# EAGLE board ws8731_breakout_panel (EAGLE 9.6.2), part 1 of 2
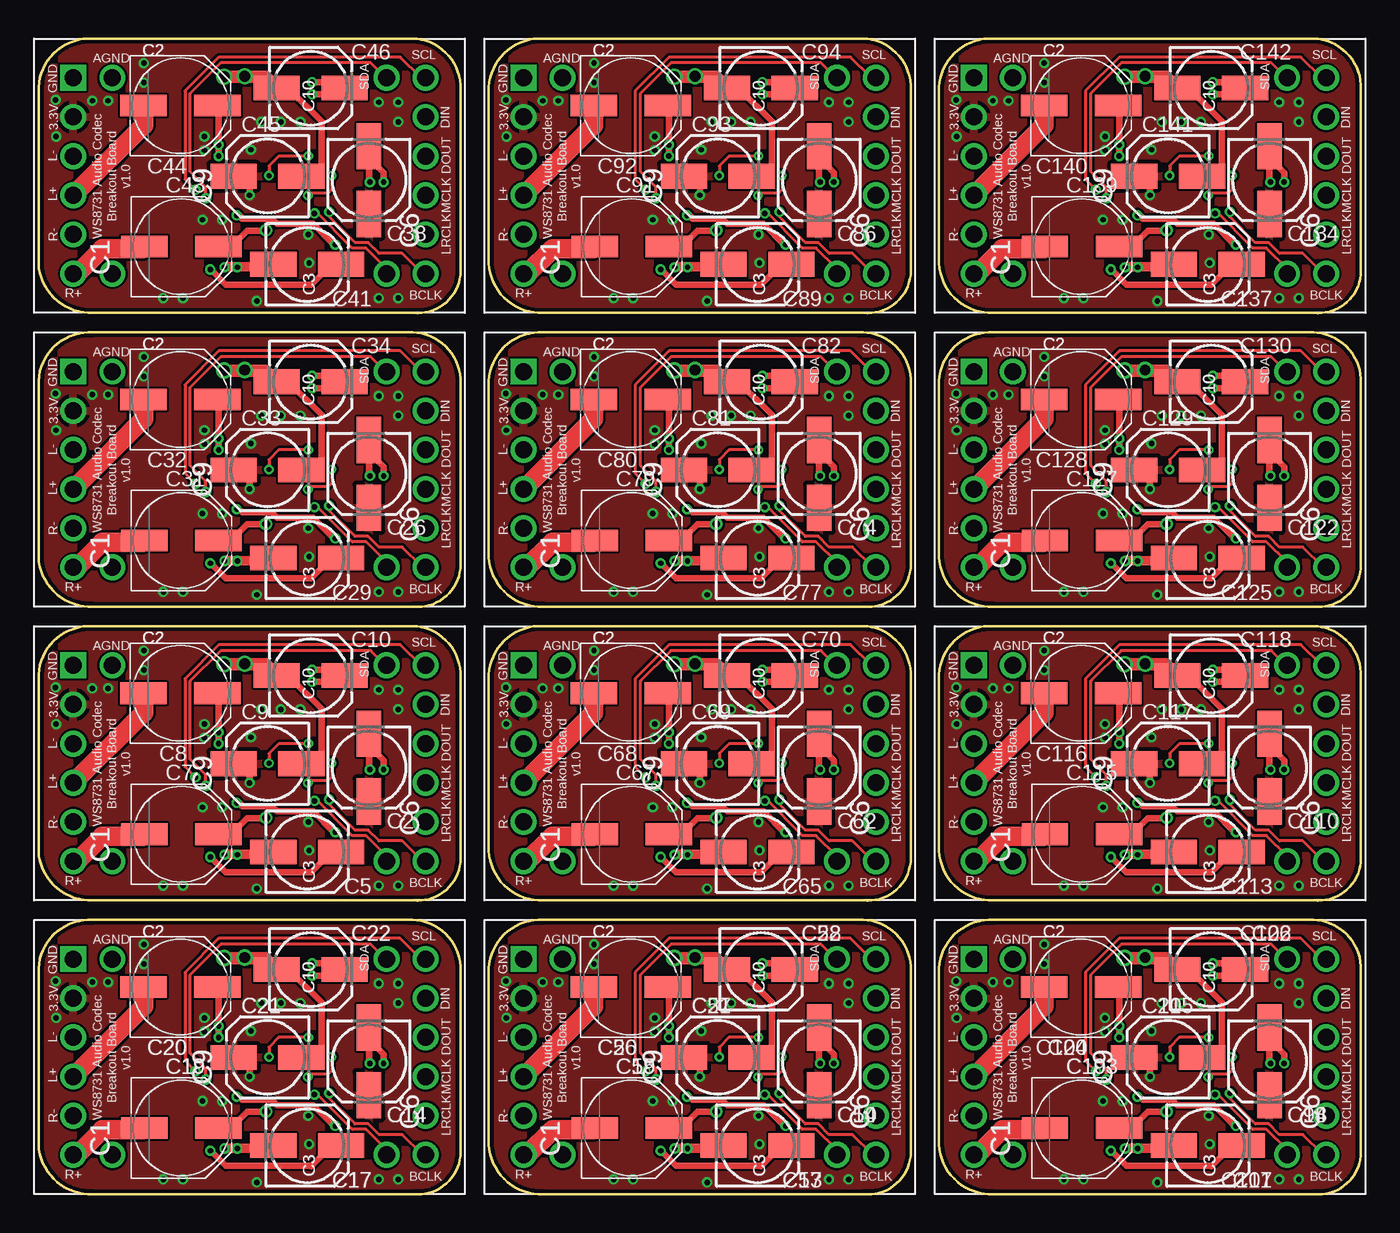
[diagram p0: board, top side]
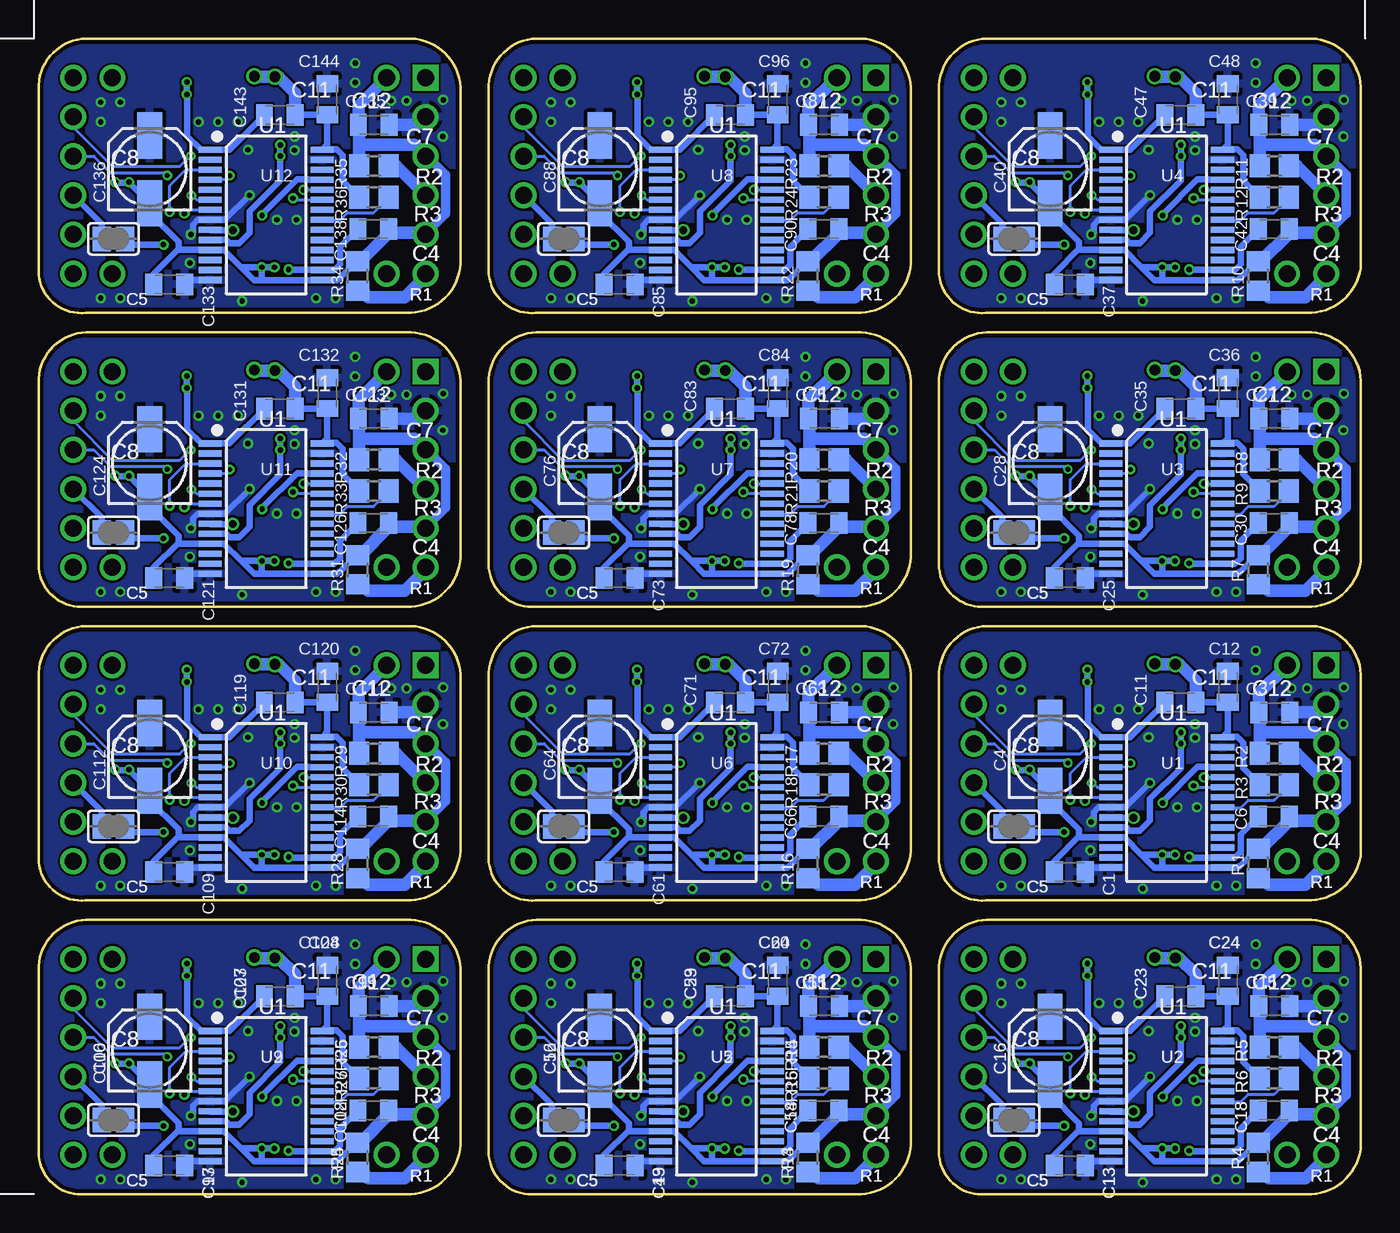
[diagram p1: board, bottom side, seen from below]

Size 85.79 x 74.95 mm. Coordinates in mm from the lower left corner, seen from the top.
Outline: 23.98,17.79 3.52,17.79 arc90 0,14.65 0,3.22 arc90 3.52,0.01 24.32,0.01 arc90 27.37,2.49 27.37,14.79 arc90 23.98,17.79
Outline: 23.98,36.84 3.52,36.84 arc90 0,33.7 0,22.27 arc90 3.52,19.06 24.32,19.06 arc90 27.37,21.54 27.37,33.84 arc90 23.98,36.84
Outline: 23.98,55.89 3.52,55.89 arc90 0,52.75 0,41.32 arc90 3.52,38.11 24.32,38.11 arc90 27.37,40.59 27.37,52.89 arc90 23.98,55.89
Outline: 23.98,74.94 3.52,74.94 arc90 0,71.8 0,60.37 arc90 3.52,57.16 24.32,57.16 arc90 27.37,59.64 27.37,71.94 arc90 23.98,74.94
Outline: 53.19,17.79 32.73,17.79 arc90 29.21,14.65 29.21,3.22 arc90 32.73,0.01 53.53,0.01 arc90 56.58,2.49 56.58,14.79 arc90 53.19,17.79
Outline: 53.19,36.84 32.73,36.84 arc90 29.21,33.7 29.21,22.27 arc90 32.73,19.06 53.53,19.06 arc90 56.58,21.54 56.58,33.84 arc90 53.19,36.84
Outline: 53.19,55.89 32.73,55.89 arc90 29.21,52.75 29.21,41.32 arc90 32.73,38.11 53.53,38.11 arc90 56.58,40.59 56.58,52.89 arc90 53.19,55.89
Outline: 53.19,74.94 32.73,74.94 arc90 29.21,71.8 29.21,60.37 arc90 32.73,57.16 53.53,57.16 arc90 56.58,59.64 56.58,71.94 arc90 53.19,74.94
Outline: 82.4,17.79 61.94,17.79 arc90 58.42,14.65 58.42,3.22 arc90 61.94,0.01 82.74,0.01 arc90 85.79,2.49 85.79,14.79 arc90 82.4,17.79
Outline: 82.4,36.84 61.94,36.84 arc90 58.42,33.7 58.42,22.27 arc90 61.94,19.06 82.74,19.06 arc90 85.79,21.54 85.79,33.84 arc90 82.4,36.84
Outline: 82.4,55.89 61.94,55.89 arc90 58.42,52.75 58.42,41.32 arc90 61.94,38.11 82.74,38.11 arc90 85.79,40.59 85.79,52.89 arc90 82.4,55.89
Outline: 82.4,74.94 61.94,74.94 arc90 58.42,71.8 58.42,60.37 arc90 61.94,57.16 82.74,57.16 arc90 85.79,59.64 85.79,71.94 arc90 82.4,74.94
Copper layers (1*16): Top 0.035mm / dielectric 1.5mm / Bottom 0.035mm
Design rules "SeeedStudio_2layer_DRU_no_angle_20140221": minimum track width 6mil, minimum drill 12mil, track to track 6mil, track to pad 6mil, pad to pad 6mil, via to via 6mil, smd to smd 0mil, copper to edge 10mil, drill to drill 10mil, minimum pad ring 10mil, minimum via ring 6mil, stop-mask expansion 2mil, vias tented up to drill 100mil, thermal gap 10mil

## Footprints (pad centres in the part's own frame; a part is rotated, then mirrored left to right if it is on the bottom)
C0805K = smd 1.1 x 1.4: 1 -1,0; 2 1,0
153CLV-0505 = smd 3 x 1.6: + 2.2,0; - -2.2,0
PANASONIC_D = smd 3 x 1.4: + 2.4,0; - -2.4,0
R0805 = smd 1.3 x 1.5: 1 -0.95,0; 2 0.95,0
SJ = smd 1.168 x 1.6: 1 -0.762,0; 2 0.762,0
SSOP28-0.65-10.2X5.2MM = smd 0.4 x 1.5: 1 -4.225,-3.625; 2 -3.575,-3.625; 3 -2.925,-3.625; 4 -2.275,-3.625; 5 -1.625,-3.625; 6 -0.975,-3.625; 7 -0.325,-3.625; 8 0.325,-3.625; 9 0.975,-3.625; 10 1.625,-3.625; 11 2.275,-3.625; 12 2.925,-3.625; 13 3.575,-3.625; 14 4.225,-3.625; 15 4.225,3.625; 16 3.575,3.625; 17 2.925,3.625; 18 2.275,3.625; 19 1.625,3.625; 20 0.975,3.625; 21 0.325,3.625; 22 -0.325,3.625; 23 -0.975,3.625; 24 -1.625,3.625; 25 -2.275,3.625; 26 -2.925,3.625; 27 -3.575,3.625; 28 -4.225,3.625
HSS_CODEC_BREAKOUT = drill 1.1 pad 1.676: 3.3 -11.43,3.81; AGND -8.89,6.35; I2S_BCLK 11.43,-6.35; I2S_DIN 11.43,3.81; I2S_DOUT 11.43,1.27; I2S_LRCLK 11.43,-3.81; I2S_MCLK 11.43,-1.27; LOUT+ -11.43,-1.27; LOUT- -11.43,1.27; NA1 -8.89,-6.35; NA2 8.89,-6.35; ROUT+ -11.43,-6.35; ROUT- -11.43,-3.81; SCL 11.43,6.35; SDA 8.89,6.35 | drill 1.1 pad 1.676 square: GND -11.43,6.35

## Placement (x,y rotation side)
C1  0.1uf  [C0805K]  18.89,20.91 180 bottom
C2  10uf  [153CLV-0505]  21.43,27.67 270 top
C3  0.1uf  [C0805K]  5.62,31.26 180 bottom
C4  10uf  [153CLV-0505]  20.16,28.37 90 bottom
C5  10uf  [153CLV-0505]  17.43,22.21 0 top
C6  0.1uf  [C0805K]  5.65,24.49 0 bottom
C7  220uf  [PANASONIC_D]  9.27,23.35 0 top
C8  220uf  [PANASONIC_D]  9.21,32.49 0 top
C9  10uf  [153CLV-0505]  14.86,27.92 180 top
C10  10uf  [153CLV-0505]  17.65,33.64 0 top
C11  0.1uf  [C0805K]  11.72,31.89 0 bottom
C12  0.1uf  [C0805K]  8.64,32.91 270 bottom
C13  0.1uf  [C0805K]  18.89,1.86 180 bottom
C14  10uf  [153CLV-0505]  21.43,8.62 270 top
C15  0.1uf  [C0805K]  5.62,12.21 180 bottom
C16  10uf  [153CLV-0505]  20.16,9.32 90 bottom
C17  10uf  [153CLV-0505]  17.43,3.16 0 top
C18  0.1uf  [C0805K]  5.65,5.44 0 bottom
C19  220uf  [PANASONIC_D]  9.27,4.3 0 top
C20  220uf  [PANASONIC_D]  9.21,13.44 0 top
C21  10uf  [153CLV-0505]  14.86,8.87 180 top
C22  10uf  [153CLV-0505]  17.65,14.59 0 top
C23  0.1uf  [C0805K]  11.72,12.84 0 bottom
C24  0.1uf  [C0805K]  8.64,13.86 270 bottom
C25  0.1uf  [C0805K]  18.89,39.96 180 bottom
C26  10uf  [153CLV-0505]  21.43,46.72 270 top
C27  0.1uf  [C0805K]  5.62,50.31 180 bottom
C28  10uf  [153CLV-0505]  20.16,47.42 90 bottom
C29  10uf  [153CLV-0505]  17.43,41.26 0 top
C30  0.1uf  [C0805K]  5.65,43.54 0 bottom
C31  220uf  [PANASONIC_D]  9.27,42.4 0 top
C32  220uf  [PANASONIC_D]  9.21,51.54 0 top
C33  10uf  [153CLV-0505]  14.86,46.97 180 top
C34  10uf  [153CLV-0505]  17.65,52.69 0 top
C35  0.1uf  [C0805K]  11.72,50.94 0 bottom
C36  0.1uf  [C0805K]  8.64,51.96 270 bottom
C37  0.1uf  [C0805K]  18.89,59.01 180 bottom
C38  10uf  [153CLV-0505]  21.43,65.77 270 top
C39  0.1uf  [C0805K]  5.62,69.36 180 bottom
C40  10uf  [153CLV-0505]  20.16,66.47 90 bottom
C41  10uf  [153CLV-0505]  17.43,60.31 0 top
C42  0.1uf  [C0805K]  5.65,62.59 0 bottom
C43  220uf  [PANASONIC_D]  9.27,61.45 0 top
C44  220uf  [PANASONIC_D]  9.21,70.59 0 top
C45  10uf  [153CLV-0505]  14.86,66.02 180 top
C46  10uf  [153CLV-0505]  17.65,71.74 0 top
C47  0.1uf  [C0805K]  11.72,69.99 0 bottom
C48  0.1uf  [C0805K]  8.64,71.01 270 bottom
C49  0.1uf  [C0805K]  48.1,1.86 180 bottom
C50  10uf  [153CLV-0505]  50.64,8.62 270 top
C51  0.1uf  [C0805K]  34.83,12.21 180 bottom
C52  10uf  [153CLV-0505]  49.37,9.32 90 bottom
C53  10uf  [153CLV-0505]  46.64,3.16 0 top
C54  0.1uf  [C0805K]  34.86,5.44 0 bottom
C55  220uf  [PANASONIC_D]  38.48,4.3 0 top
C56  220uf  [PANASONIC_D]  38.42,13.44 0 top
C57  10uf  [153CLV-0505]  44.07,8.87 180 top
C58  10uf  [153CLV-0505]  46.86,14.59 0 top
C59  0.1uf  [C0805K]  40.93,12.84 0 bottom
C60  0.1uf  [C0805K]  37.85,13.86 270 bottom
C61  0.1uf  [C0805K]  48.1,20.91 180 bottom
C62  10uf  [153CLV-0505]  50.64,27.67 270 top
C63  0.1uf  [C0805K]  34.83,31.26 180 bottom
C64  10uf  [153CLV-0505]  49.37,28.37 90 bottom
C65  10uf  [153CLV-0505]  46.64,22.21 0 top
C66  0.1uf  [C0805K]  34.86,24.49 0 bottom
C67  220uf  [PANASONIC_D]  38.48,23.35 0 top
C68  220uf  [PANASONIC_D]  38.42,32.49 0 top
C69  10uf  [153CLV-0505]  44.07,27.92 180 top
C70  10uf  [153CLV-0505]  46.86,33.64 0 top
C71  0.1uf  [C0805K]  40.93,31.89 0 bottom
C72  0.1uf  [C0805K]  37.85,32.91 270 bottom
C73  0.1uf  [C0805K]  48.1,39.96 180 bottom
C74  10uf  [153CLV-0505]  50.64,46.72 270 top
C75  0.1uf  [C0805K]  34.83,50.31 180 bottom
C76  10uf  [153CLV-0505]  49.37,47.42 90 bottom
C77  10uf  [153CLV-0505]  46.64,41.26 0 top
C78  0.1uf  [C0805K]  34.86,43.54 0 bottom
C79  220uf  [PANASONIC_D]  38.48,42.4 0 top
C80  220uf  [PANASONIC_D]  38.42,51.54 0 top
C81  10uf  [153CLV-0505]  44.07,46.97 180 top
C82  10uf  [153CLV-0505]  46.86,52.69 0 top
C83  0.1uf  [C0805K]  40.93,50.94 0 bottom
C84  0.1uf  [C0805K]  37.85,51.96 270 bottom
C85  0.1uf  [C0805K]  48.1,59.01 180 bottom
C86  10uf  [153CLV-0505]  50.64,65.77 270 top
C87  0.1uf  [C0805K]  34.83,69.36 180 bottom
C88  10uf  [153CLV-0505]  49.37,66.47 90 bottom
C89  10uf  [153CLV-0505]  46.64,60.31 0 top
C90  0.1uf  [C0805K]  34.86,62.59 0 bottom
C91  220uf  [PANASONIC_D]  38.48,61.45 0 top
C92  220uf  [PANASONIC_D]  38.42,70.59 0 top
C93  10uf  [153CLV-0505]  44.07,66.02 180 top
C94  10uf  [153CLV-0505]  46.86,71.74 0 top
C95  0.1uf  [C0805K]  40.93,69.99 0 bottom
C96  0.1uf  [C0805K]  37.85,71.01 270 bottom
C97  0.1uf  [C0805K]  77.31,1.86 180 bottom
C98  10uf  [153CLV-0505]  79.85,8.62 270 top
C99  0.1uf  [C0805K]  64.04,12.21 180 bottom
C100  10uf  [153CLV-0505]  78.58,9.32 90 bottom
C101  10uf  [153CLV-0505]  75.85,3.16 0 top
C102  0.1uf  [C0805K]  64.07,5.44 0 bottom
C103  220uf  [PANASONIC_D]  67.69,4.3 0 top
C104  220uf  [PANASONIC_D]  67.63,13.44 0 top
C105  10uf  [153CLV-0505]  73.28,8.87 180 top
C106  10uf  [153CLV-0505]  76.07,14.59 0 top
C107  0.1uf  [C0805K]  70.14,12.84 0 bottom
C108  0.1uf  [C0805K]  67.06,13.86 270 bottom
C109  0.1uf  [C0805K]  77.31,20.91 180 bottom
C110  10uf  [153CLV-0505]  79.85,27.67 270 top
C111  0.1uf  [C0805K]  64.04,31.26 180 bottom
C112  10uf  [153CLV-0505]  78.58,28.37 90 bottom
C113  10uf  [153CLV-0505]  75.85,22.21 0 top
C114  0.1uf  [C0805K]  64.07,24.49 0 bottom
C115  220uf  [PANASONIC_D]  67.69,23.35 0 top
C116  220uf  [PANASONIC_D]  67.63,32.49 0 top
C117  10uf  [153CLV-0505]  73.28,27.92 180 top
C118  10uf  [153CLV-0505]  76.07,33.64 0 top
C119  0.1uf  [C0805K]  70.14,31.89 0 bottom
C120  0.1uf  [C0805K]  67.06,32.91 270 bottom
C121  0.1uf  [C0805K]  77.31,39.96 180 bottom
C122  10uf  [153CLV-0505]  79.85,46.72 270 top
C123  0.1uf  [C0805K]  64.04,50.31 180 bottom
C124  10uf  [153CLV-0505]  78.58,47.42 90 bottom
C125  10uf  [153CLV-0505]  75.85,41.26 0 top
C126  0.1uf  [C0805K]  64.07,43.54 0 bottom
C127  220uf  [PANASONIC_D]  67.69,42.4 0 top
C128  220uf  [PANASONIC_D]  67.63,51.54 0 top
C129  10uf  [153CLV-0505]  73.28,46.97 180 top
C130  10uf  [153CLV-0505]  76.07,52.69 0 top
C131  0.1uf  [C0805K]  70.14,50.94 0 bottom
C132  0.1uf  [C0805K]  67.06,51.96 270 bottom
C133  0.1uf  [C0805K]  77.31,59.01 180 bottom
C134  10uf  [153CLV-0505]  79.85,65.77 270 top
C135  0.1uf  [C0805K]  64.04,69.36 180 bottom
C136  10uf  [153CLV-0505]  78.58,66.47 90 bottom
C137  10uf  [153CLV-0505]  75.85,60.31 0 top
C138  0.1uf  [C0805K]  64.07,62.59 0 bottom
C139  220uf  [PANASONIC_D]  67.69,61.45 0 top
C140  220uf  [PANASONIC_D]  67.63,70.59 0 top
C141  10uf  [153CLV-0505]  73.28,66.02 180 top
C142  10uf  [153CLV-0505]  76.07,71.74 0 top
C143  0.1uf  [C0805K]  70.14,69.99 0 bottom
C144  0.1uf  [C0805K]  67.06,71.01 270 bottom
R1  47k  [R0805]  6.67,21.45 270 bottom
R2  47k  [R0805]  5.62,28.59 0 bottom
R3  10k  [R0805]  5.62,26.56 0 bottom
R4  47k  [R0805]  6.67,2.4 270 bottom
R5  47k  [R0805]  5.62,9.54 0 bottom
R6  10k  [R0805]  5.62,7.51 0 bottom
R7  47k  [R0805]  6.67,40.5 270 bottom
R8  47k  [R0805]  5.62,47.64 0 bottom
R9  10k  [R0805]  5.62,45.61 0 bottom
R10  47k  [R0805]  6.67,59.55 270 bottom
R11  47k  [R0805]  5.62,66.69 0 bottom
R12  10k  [R0805]  5.62,64.66 0 bottom
R13  47k  [R0805]  35.88,2.4 270 bottom
R14  47k  [R0805]  34.83,9.54 0 bottom
R15  10k  [R0805]  34.83,7.51 0 bottom
R16  47k  [R0805]  35.88,21.45 270 bottom
R17  47k  [R0805]  34.83,28.59 0 bottom
R18  10k  [R0805]  34.83,26.56 0 bottom
R19  47k  [R0805]  35.88,40.5 270 bottom
R20  47k  [R0805]  34.83,47.64 0 bottom
R21  10k  [R0805]  34.83,45.61 0 bottom
R22  47k  [R0805]  35.88,59.55 270 bottom
R23  47k  [R0805]  34.83,66.69 0 bottom
R24  10k  [R0805]  34.83,64.66 0 bottom
R25  47k  [R0805]  65.09,2.4 270 bottom
R26  47k  [R0805]  64.04,9.54 0 bottom
R27  10k  [R0805]  64.04,7.51 0 bottom
R28  47k  [R0805]  65.09,21.45 270 bottom
R29  47k  [R0805]  64.04,28.59 0 bottom
R30  10k  [R0805]  64.04,26.56 0 bottom
R31  47k  [R0805]  65.09,40.5 270 bottom
R32  47k  [R0805]  64.04,47.64 0 bottom
R33  10k  [R0805]  64.04,45.61 0 bottom
R34  47k  [R0805]  65.09,59.55 270 bottom
R35  47k  [R0805]  64.04,66.69 0 bottom
R36  10k  [R0805]  64.04,64.66 0 bottom
SJ1  [SJ]  22.51,23.86 180 bottom
SJ2  [SJ]  22.51,4.81 180 bottom
SJ3  [SJ]  22.51,42.91 180 bottom
SJ4  [SJ]  22.51,61.96 180 bottom
SJ5  [SJ]  51.72,4.81 180 bottom
SJ6  [SJ]  51.72,23.86 180 bottom
SJ7  [SJ]  51.72,42.91 180 bottom
SJ8  [SJ]  51.72,61.96 180 bottom
SJ9  [SJ]  80.93,4.81 180 bottom
SJ10  [SJ]  80.93,23.86 180 bottom
SJ11  [SJ]  80.93,42.91 180 bottom
SJ12  [SJ]  80.93,61.96 180 bottom
U1  CODECODER-WM8731SEDS/V(SSOP28)  [SSOP28-0.65-10.2X5.2MM]  12.6,25.41 270 bottom
U2  CODECODER-WM8731SEDS/V(SSOP28)  [SSOP28-0.65-10.2X5.2MM]  12.6,6.36 270 bottom
U3  CODECODER-WM8731SEDS/V(SSOP28)  [SSOP28-0.65-10.2X5.2MM]  12.6,44.46 270 bottom
U4  CODECODER-WM8731SEDS/V(SSOP28)  [SSOP28-0.65-10.2X5.2MM]  12.6,63.51 270 bottom
U5  CODECODER-WM8731SEDS/V(SSOP28)  [SSOP28-0.65-10.2X5.2MM]  41.81,6.36 270 bottom
U6  CODECODER-WM8731SEDS/V(SSOP28)  [SSOP28-0.65-10.2X5.2MM]  41.81,25.41 270 bottom
U7  CODECODER-WM8731SEDS/V(SSOP28)  [SSOP28-0.65-10.2X5.2MM]  41.81,44.46 270 bottom
U8  CODECODER-WM8731SEDS/V(SSOP28)  [SSOP28-0.65-10.2X5.2MM]  41.81,63.51 270 bottom
U9  CODECODER-WM8731SEDS/V(SSOP28)  [SSOP28-0.65-10.2X5.2MM]  71.02,6.36 270 bottom
U10  CODECODER-WM8731SEDS/V(SSOP28)  [SSOP28-0.65-10.2X5.2MM]  71.02,25.41 270 bottom
U11  CODECODER-WM8731SEDS/V(SSOP28)  [SSOP28-0.65-10.2X5.2MM]  71.02,44.46 270 bottom
U12  CODECODER-WM8731SEDS/V(SSOP28)  [SSOP28-0.65-10.2X5.2MM]  71.02,63.51 270 bottom
U$1  AUDIO_CODEC_BREAKOUT  [HSS_CODEC_BREAKOUT]  13.68,27.95 0 top
U$2  AUDIO_CODEC_BREAKOUT  [HSS_CODEC_BREAKOUT]  13.68,47 0 top
U$3  AUDIO_CODEC_BREAKOUT  [HSS_CODEC_BREAKOUT]  13.68,66.05 0 top
U$4  AUDIO_CODEC_BREAKOUT  [HSS_CODEC_BREAKOUT]  42.89,8.9 0 top
U$5  AUDIO_CODEC_BREAKOUT  [HSS_CODEC_BREAKOUT]  42.89,27.95 0 top
U$6  AUDIO_CODEC_BREAKOUT  [HSS_CODEC_BREAKOUT]  42.89,47 0 top
U$7  AUDIO_CODEC_BREAKOUT  [HSS_CODEC_BREAKOUT]  42.89,66.05 0 top
U$8  AUDIO_CODEC_BREAKOUT  [HSS_CODEC_BREAKOUT]  72.1,8.9 0 top
U$9  AUDIO_CODEC_BREAKOUT  [HSS_CODEC_BREAKOUT]  72.1,27.95 0 top
U$10  AUDIO_CODEC_BREAKOUT  [HSS_CODEC_BREAKOUT]  72.1,47 0 top
U$11  AUDIO_CODEC_BREAKOUT  [HSS_CODEC_BREAKOUT]  72.1,66.05 0 top
U$12  AUDIO_CODEC_BREAKOUT  [HSS_CODEC_BREAKOUT]  13.68,8.9 0 top

## Library data of the parts
C1 C3 C6 C11-C13 C15 C18 C23-C25 C27 C30 C35-C37 C39 C42 C47-C49 C51 C54 C59-C61 C63 C66 C71-C73 C75 C78 C83-C85 C87 C90 C95-C97 C99 C102 C107-C109 C111 C114 C119-C121 C123 C126 C131-C133 C135 C138 C143 C144 = adafruit
C2 C4 C5 C9 C10 C14 C16 C17 C21 C22 C26 C28 C29 C33 C34 C38 C40 C41 C45 C46 C50 C52 C53 C57 C58 C62 C64 C65 C69 C70 C74 C76 C77 C81 C82 C86 C88 C89 C93 C94 C98 C100 C101 C105 C106 C110 C112 C113 C117 C118 C122 C124 C125 C129 C130 C134 C136 C137 C141 C142 = adafruit-with-additions
C7 C8 C19 C20 C31 C32 C43 C44 C55 C56 C67 C68 C79 C80 C91 C92 C103 C104 C115 C116 C127 C128 C139 C140 = SparkFun-Capacitors
R1-R36 = rcl; SPICEPREFIX: R
SJ1-SJ12 = jumper
U1-U12 = CODECODER-WM8731SEDS_V_SSOP28_; AVAILABILITY: Warning; DESCRIPTION: Audio Interface 24 b Serial 28-SSOP; MF: Cirrus Logic; MP: WM8731SEDS/V; PACKAGE: SSOP-28 Cirrus Logic; PRICE: None; PURCHASE-URL: https://pricing.snapeda.com/search/part/WM8731SEDS/V/?ref=eda
U$1-U$12 = nathans-custom-parts

## Nets
3.3V: C13.1 C14.+ C15.1 C16.+ C21.+ C24.1 U2.8 U2.14 U2.27 U$12.3.3
3.3V1: C1.1 C2.+ C3.1 C4.+ C9.+ C12.1 U1.8 U1.14 U1.27 U$1.3.3
3.3V2: C25.1 C26.+ C27.1 C28.+ C33.+ C36.1 U3.8 U3.14 U3.27 U$2.3.3
3.3V3: C37.1 C38.+ C39.1 C40.+ C45.+ C48.1 U4.8 U4.14 U4.27 U$3.3.3
3.3V4: C49.1 C50.+ C51.1 C52.+ C57.+ C60.1 U5.8 U5.14 U5.27 U$4.3.3
3.3V5: C61.1 C62.+ C63.1 C64.+ C69.+ C72.1 U6.8 U6.14 U6.27 U$5.3.3
3.3V6: C73.1 C74.+ C75.1 C76.+ C81.+ C84.1 U7.8 U7.14 U7.27 U$6.3.3
3.3V7: C85.1 C86.+ C87.1 C88.+ C93.+ C96.1 U8.8 U8.14 U8.27 U$7.3.3
3.3V8: C97.1 C98.+ C99.1 C100.+ C105.+ C108.1 U9.8 U9.14 U9.27 U$8.3.3
3.3V9: C109.1 C110.+ C111.1 C112.+ C117.+ C120.1 U10.8 U10.14 U10.27 U$9.3.3
3.3V10: C121.1 C122.+ C123.1 C124.+ C129.+ C132.1 U11.8 U11.14 U11.27 U$10.3.3
3.3V11: C133.1 C134.+ C135.1 C136.+ C141.+ C144.1 U12.8 U12.14 U12.27 U$11.3.3
ADCLRCLK: U2.7 U$12.NA2
ADCLRCLK1: U1.7 U$1.NA2
ADCLRCLK2: U3.7 U$2.NA2
ADCLRCLK3: U4.7 U$3.NA2
ADCLRCLK4: U5.7 U$4.NA2
ADCLRCLK5: U6.7 U$5.NA2
ADCLRCLK6: U7.7 U$6.NA2
ADCLRCLK7: U8.7 U$7.NA2
ADCLRCLK8: U9.7 U$8.NA2
ADCLRCLK9: U10.7 U$9.NA2
ADCLRCLK10: U11.7 U$10.NA2
ADCLRCLK11: U12.7 U$11.NA2
AGND: C13.2 C14.- C15.2 C16.- C17.- C18.2 R4.1 R5.1 U2.11 U2.15 U$12.AGND U$12.LOUT- U$12.ROUT-
AGND1: C1.2 C2.- C3.2 C4.- C5.- C6.2 R1.1 R2.1 U1.11 U1.15 U$1.AGND U$1.LOUT- U$1.ROUT-
AGND2: C25.2 C26.- C27.2 C28.- C29.- C30.2 R7.1 R8.1 U3.11 U3.15 U$2.AGND U$2.LOUT- U$2.ROUT-
AGND3: C37.2 C38.- C39.2 C40.- C41.- C42.2 R10.1 R11.1 U4.11 U4.15 U$3.AGND U$3.LOUT- U$3.ROUT-
AGND4: C49.2 C50.- C51.2 C52.- C53.- C54.2 R13.1 R14.1 U5.11 U5.15 U$4.AGND U$4.LOUT- U$4.ROUT-
AGND5: C61.2 C62.- C63.2 C64.- C65.- C66.2 R16.1 R17.1 U6.11 U6.15 U$5.AGND U$5.LOUT- U$5.ROUT-
AGND6: C73.2 C74.- C75.2 C76.- C77.- C78.2 R19.1 R20.1 U7.11 U7.15 U$6.AGND U$6.LOUT- U$6.ROUT-
AGND7: C85.2 C86.- C87.2 C88.- C89.- C90.2 R22.1 R23.1 U8.11 U8.15 U$7.AGND U$7.LOUT- U$7.ROUT-
AGND8: C97.2 C98.- C99.2 C100.- C101.- C102.2 R25.1 R26.1 U9.11 U9.15 U$8.AGND U$8.LOUT- U$8.ROUT-
AGND9: C109.2 C110.- C111.2 C112.- C113.- C114.2 R28.1 R29.1 U10.11 U10.15 U$9.AGND U$9.LOUT- U$9.ROUT-
AGND10: C121.2 C122.- C123.2 C124.- C125.- C126.2 R31.1 R32.1 U11.11 U11.15 U$10.AGND U$10.LOUT- U$10.ROUT-
AGND11: C133.2 C134.- C135.2 C136.- C137.- C138.2 R34.1 R35.1 U12.11 U12.15 U$11.AGND U$11.LOUT- U$11.ROUT-
BCLK: U2.3 U$12.I2S_BCLK
BCLK1: U1.3 U$1.I2S_BCLK
BCLK2: U3.3 U$2.I2S_BCLK
BCLK3: U4.3 U$3.I2S_BCLK
BCLK4: U5.3 U$4.I2S_BCLK
BCLK5: U6.3 U$5.I2S_BCLK
BCLK6: U7.3 U$6.I2S_BCLK
BCLK7: U8.3 U$7.I2S_BCLK
BCLK8: U9.3 U$8.I2S_BCLK
BCLK9: U10.3 U$9.I2S_BCLK
BCLK10: U11.3 U$10.I2S_BCLK
BCLK11: U12.3 U$11.I2S_BCLK
CLKOUT: U2.2
CLKOUT1: U1.2
CLKOUT2: U3.2
CLKOUT3: U4.2
CLKOUT4: U5.2
CLKOUT5: U6.2
CLKOUT6: U7.2
CLKOUT7: U8.2
CLKOUT8: U9.2
CLKOUT9: U10.2
CLKOUT10: U11.2
CLKOUT11: U12.2
DBVDD: C22.+ C23.1 U2.1
DBVDD1: C10.+ C11.1 U1.1
DBVDD2: C34.+ C35.1 U3.1
DBVDD3: C46.+ C47.1 U4.1
DBVDD4: C58.+ C59.1 U5.1
DBVDD5: C70.+ C71.1 U6.1
DBVDD6: C82.+ C83.1 U7.1
DBVDD7: C94.+ C95.1 U8.1
DBVDD8: C106.+ C107.1 U9.1
DBVDD9: C118.+ C119.1 U10.1
DBVDD10: C130.+ C131.1 U11.1
DBVDD11: C142.+ C143.1 U12.1
DGND: C21.- C22.- C23.2 C24.2 R6.1 U2.28
DGND1: C9.- C10.- C11.2 C12.2 R3.1 U1.28
DGND2: C33.- C34.- C35.2 C36.2 R9.1 U3.28
DGND3: C45.- C46.- C47.2 C48.2 R12.1 U4.28
DGND4: C57.- C58.- C59.2 C60.2 R15.1 U5.28
DGND5: C69.- C70.- C71.2 C72.2 R18.1 U6.28
DGND6: C81.- C82.- C83.2 C84.2 R21.1 U7.28
DGND7: C93.- C94.- C95.2 C96.2 R24.1 U8.28
DGND8: C105.- C106.- C107.2 C108.2 R27.1 U9.28
DGND9: C117.- C118.- C119.2 C120.2 R30.1 U10.28
DGND10: C129.- C130.- C131.2 C132.2 R33.1 U11.28
DGND11: C141.- C142.- C143.2 C144.2 R36.1 U12.28
DIN: U2.4 U$12.I2S_DIN
DIN1: U1.4 U$1.I2S_DIN
DIN2: U3.4 U$2.I2S_DIN
DIN3: U4.4 U$3.I2S_DIN
DIN4: U5.4 U$4.I2S_DIN
DIN5: U6.4 U$5.I2S_DIN
DIN6: U7.4 U$6.I2S_DIN
DIN7: U8.4 U$7.I2S_DIN
DIN8: U9.4 U$8.I2S_DIN
DIN9: U10.4 U$9.I2S_DIN
DIN10: U11.4 U$10.I2S_DIN
DIN11: U12.4 U$11.I2S_DIN
DOUT: U2.6 U$12.I2S_DOUT
DOUT1: U1.6 U$1.I2S_DOUT
DOUT2: U3.6 U$2.I2S_DOUT
DOUT3: U4.6 U$3.I2S_DOUT
DOUT4: U5.6 U$4.I2S_DOUT
DOUT5: U6.6 U$5.I2S_DOUT
DOUT6: U7.6 U$6.I2S_DOUT
DOUT7: U8.6 U$7.I2S_DOUT
DOUT8: U9.6 U$8.I2S_DOUT
DOUT9: U10.6 U$9.I2S_DOUT
DOUT10: U11.6 U$10.I2S_DOUT
DOUT11: U12.6 U$11.I2S_DOUT
GND: U$12.GND
GND1: U$1.GND
GND2: U$2.GND
GND3: U$3.GND
GND4: U$4.GND
GND5: U$5.GND
GND6: U$6.GND
GND7: U$7.GND
GND8: U$8.GND
GND9: U$9.GND
GND10: U$10.GND
GND11: U$11.GND
I2S_MCLK: SJ2.2 U$12.I2S_MCLK
I2S_MCLK1: SJ1.2 U$1.I2S_MCLK
I2S_MCLK2: SJ3.2 U$2.I2S_MCLK
I2S_MCLK3: SJ4.2 U$3.I2S_MCLK
I2S_MCLK4: SJ5.2 U$4.I2S_MCLK
I2S_MCLK5: SJ6.2 U$5.I2S_MCLK
I2S_MCLK6: SJ7.2 U$6.I2S_MCLK
I2S_MCLK7: SJ8.2 U$7.I2S_MCLK
I2S_MCLK8: SJ9.2 U$8.I2S_MCLK
I2S_MCLK9: SJ10.2 U$9.I2S_MCLK
I2S_MCLK10: SJ11.2 U$10.I2S_MCLK
I2S_MCLK11: SJ12.2 U$11.I2S_MCLK
LHPOUT: C19.+ U2.9
LHPOUT1: C7.+ U1.9
LHPOUT2: C31.+ U3.9
LHPOUT3: C43.+ U4.9
LHPOUT4: C55.+ U5.9
LHPOUT5: C67.+ U6.9
LHPOUT6: C79.+ U7.9
LHPOUT7: C91.+ U8.9
LHPOUT8: C103.+ U9.9
LHPOUT9: C115.+ U10.9
LHPOUT10: C127.+ U11.9
LHPOUT11: C139.+ U12.9
LRCLK: U2.5
LRCLK1: U1.5
LRCLK2: U3.5
LRCLK3: U4.5
LRCLK4: U5.5
LRCLK5: U6.5
LRCLK6: U7.5
LRCLK7: U8.5
LRCLK8: U9.5
LRCLK9: U10.5
LRCLK10: U11.5
LRCLK11: U12.5
LRLCK: U$12.I2S_LRCLK
LRLCK1: U$1.I2S_LRCLK
LRLCK2: U$2.I2S_LRCLK
LRLCK3: U$3.I2S_LRCLK
LRLCK4: U$4.I2S_LRCLK
LRLCK5: U$5.I2S_LRCLK
LRLCK6: U$6.I2S_LRCLK
LRLCK7: U$7.I2S_LRCLK
LRLCK8: U$8.I2S_LRCLK
LRLCK9: U$9.I2S_LRCLK
LRLCK10: U$10.I2S_LRCLK
LRLCK11: U$11.I2S_LRCLK
MCLK: SJ2.1 U2.25
MCLK1: SJ1.1 U1.25
MCLK2: SJ3.1 U3.25
MCLK3: SJ4.1 U4.25
MCLK4: SJ5.1 U5.25
MCLK5: SJ6.1 U6.25
MCLK6: SJ7.1 U7.25
MCLK7: SJ8.1 U8.25
MCLK8: SJ9.1 U9.25
MCLK9: SJ10.1 U10.25
MCLK10: SJ11.1 U11.25
MCLK11: SJ12.1 U12.25
MODE1: R6.2 U2.21
MODE2: R3.2 U1.21
MODE3: R9.2 U3.21
MODE4: R12.2 U4.21
MODE5: R15.2 U5.21
MODE6: R18.2 U6.21
MODE7: R21.2 U7.21
MODE8: R24.2 U8.21
MODE9: R27.2 U9.21
MODE10: R30.2 U10.21
MODE11: R33.2 U11.21
MODE12: R36.2 U12.21
N$1: C5.+ C6.1 U1.16
N$2: C17.+ C18.1 U2.16
N$3: C20.- R5.2 U$12.LOUT+
N$4: C19.- R4.2 U$12.ROUT+
N$5: C8.- R2.2 U$1.LOUT+
N$6: C7.- R1.2 U$1.ROUT+
N$7: C29.+ C30.1 U3.16
N$8: C32.- R8.2 U$2.LOUT+
N$9: C31.- R7.2 U$2.ROUT+
N$10: C41.+ C42.1 U4.16
N$11: C44.- R11.2 U$3.LOUT+
N$12: C43.- R10.2 U$3.ROUT+
N$13: C53.+ C54.1 U5.16
N$14: C56.- R14.2 U$4.LOUT+
N$15: C55.- R13.2 U$4.ROUT+
N$16: C65.+ C66.1 U6.16
N$17: C68.- R17.2 U$5.LOUT+
N$18: C67.- R16.2 U$5.ROUT+
N$19: C77.+ C78.1 U7.16
N$20: C80.- R20.2 U$6.LOUT+
N$21: C79.- R19.2 U$6.ROUT+
N$22: C89.+ C90.1 U8.16
N$23: C92.- R23.2 U$7.LOUT+
N$24: C91.- R22.2 U$7.ROUT+
N$25: C101.+ C102.1 U9.16
N$26: C104.- R26.2 U$8.LOUT+
N$27: C103.- R25.2 U$8.ROUT+
N$28: C113.+ C114.1 U10.16
N$29: C116.- R29.2 U$9.LOUT+
N$30: C115.- R28.2 U$9.ROUT+
N$31: C125.+ C126.1 U11.16
N$32: C128.- R32.2 U$10.LOUT+
N$33: C127.- R31.2 U$10.ROUT+
N$34: C137.+ C138.1 U12.16
N$35: C140.- R35.2 U$11.LOUT+
N$36: C139.- R34.2 U$11.ROUT+
RHPOUT: C20.+ U2.10
RHPOUT1: C8.+ U1.10
RHPOUT2: C32.+ U3.10
RHPOUT3: C44.+ U4.10
RHPOUT4: C56.+ U5.10
RHPOUT5: C68.+ U6.10
RHPOUT6: C80.+ U7.10
RHPOUT7: C92.+ U8.10
RHPOUT8: C104.+ U9.10
RHPOUT9: C116.+ U10.10
RHPOUT10: C128.+ U11.10
RHPOUT11: C140.+ U12.10
SCL: U2.24 U$12.SCL
SCL1: U1.24 U$1.SCL
SCL2: U3.24 U$2.SCL
SCL3: U4.24 U$3.SCL
SCL4: U5.24 U$4.SCL
SCL5: U6.24 U$5.SCL
SCL6: U7.24 U$6.SCL
SCL7: U8.24 U$7.SCL
SCL8: U9.24 U$8.SCL
SCL9: U10.24 U$9.SCL
SCL10: U11.24 U$10.SCL
SCL11: U12.24 U$11.SCL
SDA: U2.23 U$12.SDA
SDA1: U1.23 U$1.SDA
SDA2: U3.23 U$2.SDA
SDA3: U4.23 U$3.SDA
SDA4: U5.23 U$4.SDA
SDA5: U6.23 U$5.SDA
SDA6: U7.23 U$6.SDA
SDA7: U8.23 U$7.SDA
SDA8: U9.23 U$8.SDA
SDA9: U10.23 U$9.SDA
SDA10: U11.23 U$10.SDA
SDA11: U12.23 U$11.SDA

## Tracks (layer width: path | path; a pad name or v marks a point on that pad's centre or on a via)
3.3V  (via drill 0.35)
  Top 0.406: v13.68,7.63 13.68,8.9 12.69,8.9 C21.+ | C14.+ 21.37,6.48 21.37,7.19
  Bottom 0.406: C13.1 17.61,2.14 U2.14 | v17.49,5.09 17.34,5.25 17.34,5.74 17.03,6.04 U2.8 15.28,6.04 v13.68,7.63
  Bottom 0.813: C15.1 2.76,12.21 U$12.3.3
  other vias: 10.76,10.56 10.76,11.44 13.78,10.59 10.64,6.05 11.91,6.05 8.1,0.97 9.37,0.97 22.07,0.97 23.34,0.97 14.45,12.4 15.72,12.4 6.83,14.94 6.83,16.21 23.34,13.67 23.34,12.4 22.07,13.67 16.99,12.4 17.56,3.25 14.16,0.78 3.49,13.76 4.51,13.76 1.11,13.83 1.14,11.44
  pour Top: 26.92,3 26.92,14.8 arc90 23.9,17.83 3.66,17.83 arc90 0.25,14.42 0.25,3.38 arc90 3.62,0.01 23.94,0.01 arc90
  pour Bottom: 26.92,3 26.92,14.81 arc90 23.94,17.79 3.56,17.79 arc90 0.32,14.56 0.32,3.25 arc90 3.56,0.01 23.94,0.01 arc90
3.3V1  (via drill 0.35)
  Top 0.406: v13.68,26.68 13.68,27.95 12.69,27.95 C9.+ | C2.+ 21.37,25.53 21.37,26.24
  Bottom 0.406: C1.1 17.61,21.19 U1.14 | v17.49,24.14 17.34,24.3 17.34,24.79 17.03,25.09 U1.8 15.28,25.09 v13.68,26.68
  Bottom 0.813: C3.1 2.76,31.26 U$1.3.3
  other vias: 10.76,29.61 10.76,30.49 13.78,29.64 10.64,25.1 11.91,25.1 8.1,20.02 9.37,20.02 22.07,20.02 23.34,20.02 14.45,31.45 15.72,31.45 6.83,33.99 6.83,35.26 23.34,32.72 23.34,31.45 22.07,32.72 16.99,31.45 17.56,22.3 14.16,19.83 3.49,32.81 4.51,32.81 1.11,32.88 1.14,30.49
  pour Top: 26.92,22.05 26.92,33.85 arc90 23.9,36.88 3.66,36.88 arc90 0.25,33.47 0.25,22.43 arc90 3.62,19.06 23.94,19.06 arc90
  pour Bottom: 26.92,22.05 26.92,33.86 arc90 23.94,36.84 3.56,36.84 arc90 0.32,33.61 0.32,22.3 arc90 3.56,19.06 23.94,19.06 arc90
3.3V2  (via drill 0.35)
  Top 0.406: v13.68,45.73 13.68,47 12.69,47 C33.+ | C26.+ 21.37,44.58 21.37,45.29
  Bottom 0.406: C25.1 17.61,40.24 U3.14 | v17.49,43.19 17.34,43.35 17.34,43.84 17.03,44.14 U3.8 15.28,44.14 v13.68,45.73
  Bottom 0.813: C27.1 2.76,50.31 U$2.3.3
  other vias: 10.76,48.66 10.76,49.54 13.78,48.69 10.64,44.15 11.91,44.15 8.1,39.07 9.37,39.07 22.07,39.07 23.34,39.07 14.45,50.5 15.72,50.5 6.83,53.04 6.83,54.31 23.34,51.77 23.34,50.5 22.07,51.77 16.99,50.5 17.56,41.35 14.16,38.88 3.49,51.86 4.51,51.86 1.11,51.93 1.14,49.54
  pour Top: 26.92,41.1 26.92,52.9 arc90 23.9,55.93 3.66,55.93 arc90 0.25,52.52 0.25,41.48 arc90 3.62,38.11 23.94,38.11 arc90
  pour Bottom: 26.92,41.1 26.92,52.91 arc90 23.94,55.89 3.56,55.89 arc90 0.32,52.66 0.32,41.35 arc90 3.56,38.11 23.94,38.11 arc90
3.3V3  (via drill 0.35)
  Top 0.406: v13.68,64.78 13.68,66.05 12.69,66.05 C45.+ | C38.+ 21.37,63.63 21.37,64.34
  Bottom 0.406: C37.1 17.61,59.29 U4.14 | v17.49,62.24 17.34,62.4 17.34,62.89 17.03,63.19 U4.8 15.28,63.19 v13.68,64.78
  Bottom 0.813: C39.1 2.76,69.36 U$3.3.3
  other vias: 10.76,67.71 10.76,68.59 13.78,67.74 10.64,63.2 11.91,63.2 8.1,58.12 9.37,58.12 22.07,58.12 23.34,58.12 14.45,69.55 15.72,69.55 6.83,72.09 6.83,73.36 23.34,70.82 23.34,69.55 22.07,70.82 16.99,69.55 17.56,60.4 14.16,57.93 3.49,70.91 4.51,70.91 1.11,70.98 1.14,68.59
  pour Top: 26.92,60.15 26.92,71.95 arc90 23.9,74.98 3.66,74.98 arc90 0.25,71.57 0.25,60.53 arc90 3.62,57.16 23.94,57.16 arc90
  pour Bottom: 26.92,60.15 26.92,71.96 arc90 23.94,74.94 3.56,74.94 arc90 0.32,71.71 0.32,60.4 arc90 3.56,57.16 23.94,57.16 arc90
3.3V4  (via drill 0.35)
  Top 0.406: v42.89,7.63 42.89,8.9 41.9,8.9 C57.+ | C50.+ 50.58,6.48 50.58,7.19
  Bottom 0.406: C49.1 46.82,2.14 U5.14 | v46.7,5.09 46.55,5.25 46.55,5.74 46.24,6.04 U5.8 44.49,6.04 v42.89,7.63
  Bottom 0.813: C51.1 31.97,12.21 U$4.3.3
  other vias: 39.97,10.56 39.97,11.44 42.99,10.59 39.85,6.05 41.12,6.05 37.31,0.97 38.58,0.97 51.28,0.97 52.55,0.97 43.66,12.4 44.93,12.4 36.04,14.94 36.04,16.21 52.55,13.67 52.55,12.4 51.28,13.67 46.2,12.4 46.77,3.25 43.37,0.78 32.7,13.76 33.72,13.76 30.32,13.83 30.35,11.44
  pour Top: 56.13,3 56.13,14.8 arc90 53.11,17.83 32.87,17.83 arc90 29.46,14.42 29.46,3.38 arc90 32.83,0.01 53.15,0.01 arc90
  pour Bottom: 56.13,3 56.13,14.81 arc90 53.15,17.79 32.77,17.79 arc90 29.53,14.56 29.53,3.25 arc90 32.77,0.01 53.15,0.01 arc90
3.3V5  (via drill 0.35)
  Top 0.406: v42.89,26.68 42.89,27.95 41.9,27.95 C69.+ | C62.+ 50.58,25.53 50.58,26.24
  Bottom 0.406: C61.1 46.82,21.19 U6.14 | v46.7,24.14 46.55,24.3 46.55,24.79 46.24,25.09 U6.8 44.49,25.09 v42.89,26.68
  Bottom 0.813: C63.1 31.97,31.26 U$5.3.3
  other vias: 39.97,29.61 39.97,30.49 42.99,29.64 39.85,25.1 41.12,25.1 37.31,20.02 38.58,20.02 51.28,20.02 52.55,20.02 43.66,31.45 44.93,31.45 36.04,33.99 36.04,35.26 52.55,32.72 52.55,31.45 51.28,32.72 46.2,31.45 46.77,22.3 43.37,19.83 32.7,32.81 33.72,32.81 30.32,32.88 30.35,30.49
  pour Top: 56.13,22.05 56.13,33.85 arc90 53.11,36.88 32.87,36.88 arc90 29.46,33.47 29.46,22.43 arc90 32.83,19.06 53.15,19.06 arc90
  pour Bottom: 56.13,22.05 56.13,33.86 arc90 53.15,36.84 32.77,36.84 arc90 29.53,33.61 29.53,22.3 arc90 32.77,19.06 53.15,19.06 arc90
3.3V6  (via drill 0.35)
  Top 0.406: v42.89,45.73 42.89,47 41.9,47 C81.+ | C74.+ 50.58,44.58 50.58,45.29
  Bottom 0.406: C73.1 46.82,40.24 U7.14 | v46.7,43.19 46.55,43.35 46.55,43.84 46.24,44.14 U7.8 44.49,44.14 v42.89,45.73
  Bottom 0.813: C75.1 31.97,50.31 U$6.3.3
  other vias: 39.97,48.66 39.97,49.54 42.99,48.69 39.85,44.15 41.12,44.15 37.31,39.07 38.58,39.07 51.28,39.07 52.55,39.07 43.66,50.5 44.93,50.5 36.04,53.04 36.04,54.31 52.55,51.77 52.55,50.5 51.28,51.77 46.2,50.5 46.77,41.35 43.37,38.88 32.7,51.86 33.72,51.86 30.32,51.93 30.35,49.54
  pour Top: 56.13,41.1 56.13,52.9 arc90 53.11,55.93 32.87,55.93 arc90 29.46,52.52 29.46,41.48 arc90 32.83,38.11 53.15,38.11 arc90
  pour Bottom: 56.13,41.1 56.13,52.91 arc90 53.15,55.89 32.77,55.89 arc90 29.53,52.66 29.53,41.35 arc90 32.77,38.11 53.15,38.11 arc90
3.3V7  (via drill 0.35)
  Top 0.406: v42.89,64.78 42.89,66.05 41.9,66.05 C93.+ | C86.+ 50.58,63.63 50.58,64.34
  Bottom 0.406: C85.1 46.82,59.29 U8.14 | v46.7,62.24 46.55,62.4 46.55,62.89 46.24,63.19 U8.8 44.49,63.19 v42.89,64.78
  Bottom 0.813: C87.1 31.97,69.36 U$7.3.3
  other vias: 39.97,67.71 39.97,68.59 42.99,67.74 39.85,63.2 41.12,63.2 37.31,58.12 38.58,58.12 51.28,58.12 52.55,58.12 43.66,69.55 44.93,69.55 36.04,72.09 36.04,73.36 52.55,70.82 52.55,69.55 51.28,70.82 46.2,69.55 46.77,60.4 43.37,57.93 32.7,70.91 33.72,70.91 30.32,70.98 30.35,68.59
  pour Top: 56.13,60.15 56.13,71.95 arc90 53.11,74.98 32.87,74.98 arc90 29.46,71.57 29.46,60.53 arc90 32.83,57.16 53.15,57.16 arc90
  pour Bottom: 56.13,60.15 56.13,71.96 arc90 53.15,74.94 32.77,74.94 arc90 29.53,71.71 29.53,60.4 arc90 32.77,57.16 53.15,57.16 arc90
3.3V8  (via drill 0.35)
  Top 0.406: v72.1,7.63 72.1,8.9 71.11,8.9 C105.+ | C98.+ 79.79,6.48 79.79,7.19
  Bottom 0.406: C97.1 76.03,2.14 U9.14 | v75.91,5.09 75.76,5.25 75.76,5.74 75.45,6.04 U9.8 73.7,6.04 v72.1,7.63
  Bottom 0.813: C99.1 61.18,12.21 U$8.3.3
  other vias: 69.18,10.56 69.18,11.44 72.2,10.59 69.06,6.05 70.33,6.05 66.52,0.97 67.79,0.97 80.49,0.97 81.76,0.97 72.87,12.4 74.14,12.4 65.25,14.94 65.25,16.21 81.76,13.67 81.76,12.4 80.49,13.67 75.41,12.4 75.98,3.25 72.58,0.78 61.91,13.76 62.93,13.76 59.53,13.83 59.56,11.44
  pour Top: 85.34,3 85.34,14.8 arc90 82.32,17.83 62.08,17.83 arc90 58.67,14.42 58.67,3.38 arc90 62.04,0.01 82.36,0.01 arc90
  pour Bottom: 85.34,3 85.34,14.81 arc90 82.36,17.79 61.98,17.79 arc90 58.74,14.56 58.74,3.25 arc90 61.98,0.01 82.36,0.01 arc90
3.3V9  (via drill 0.35)
  Top 0.406: v72.1,26.68 72.1,27.95 71.11,27.95 C117.+ | C110.+ 79.79,25.53 79.79,26.24
  Bottom 0.406: C109.1 76.03,21.19 U10.14 | v75.91,24.14 75.76,24.3 75.76,24.79 75.45,25.09 U10.8 73.7,25.09 v72.1,26.68
  Bottom 0.813: C111.1 61.18,31.26 U$9.3.3
  other vias: 69.18,29.61 69.18,30.49 72.2,29.64 69.06,25.1 70.33,25.1 66.52,20.02 67.79,20.02 80.49,20.02 81.76,20.02 72.87,31.45 74.14,31.45 65.25,33.99 65.25,35.26 81.76,32.72 81.76,31.45 80.49,32.72 75.41,31.45 75.98,22.3 72.58,19.83 61.91,32.81 62.93,32.81 59.53,32.88 59.56,30.49
  pour Top: 85.34,22.05 85.34,33.85 arc90 82.32,36.88 62.08,36.88 arc90 58.67,33.47 58.67,22.43 arc90 62.04,19.06 82.36,19.06 arc90
  pour Bottom: 85.34,22.05 85.34,33.86 arc90 82.36,36.84 61.98,36.84 arc90 58.74,33.61 58.74,22.3 arc90 61.98,19.06 82.36,19.06 arc90
3.3V10  (via drill 0.35)
  Top 0.406: v72.1,45.73 72.1,47 71.11,47 C129.+ | C122.+ 79.79,44.58 79.79,45.29
  Bottom 0.406: C121.1 76.03,40.24 U11.14 | v75.91,43.19 75.76,43.35 75.76,43.84 75.45,44.14 U11.8 73.7,44.14 v72.1,45.73
  Bottom 0.813: C123.1 61.18,50.31 U$10.3.3
  other vias: 69.18,48.66 69.18,49.54 72.2,48.69 69.06,44.15 70.33,44.15 66.52,39.07 67.79,39.07 80.49,39.07 81.76,39.07 72.87,50.5 74.14,50.5 65.25,53.04 65.25,54.31 81.76,51.77 81.76,50.5 80.49,51.77 75.41,50.5 75.98,41.35 72.58,38.88 61.91,51.86 62.93,51.86 59.53,51.93 59.56,49.54
  pour Top: 85.34,41.1 85.34,52.9 arc90 82.32,55.93 62.08,55.93 arc90 58.67,52.52 58.67,41.48 arc90 62.04,38.11 82.36,38.11 arc90
  pour Bottom: 85.34,41.1 85.34,52.91 arc90 82.36,55.89 61.98,55.89 arc90 58.74,52.66 58.74,41.35 arc90 61.98,38.11 82.36,38.11 arc90
3.3V11  (via drill 0.35)
  Top 0.406: v72.1,64.78 72.1,66.05 71.11,66.05 C141.+ | C134.+ 79.79,63.63 79.79,64.34
  Bottom 0.406: C133.1 76.03,59.29 U12.14 | v75.91,62.24 75.76,62.4 75.76,62.89 75.45,63.19 U12.8 73.7,63.19 v72.1,64.78
  Bottom 0.813: C135.1 61.18,69.36 U$11.3.3
  other vias: 69.18,67.71 69.18,68.59 72.2,67.74 69.06,63.2 70.33,63.2 66.52,58.12 67.79,58.12 80.49,58.12 81.76,58.12 72.87,69.55 74.14,69.55 65.25,72.09 65.25,73.36 81.76,70.82 81.76,69.55 80.49,70.82 75.41,69.55 75.98,60.4 72.58,57.93 61.91,70.91 62.93,70.91 59.53,70.98 59.56,68.59
  pour Top: 85.34,60.15 85.34,71.95 arc90 82.32,74.98 62.08,74.98 arc90 58.67,71.57 58.67,60.53 arc90 62.04,57.16 82.36,57.16 arc90
  pour Bottom: 85.34,60.15 85.34,71.96 arc90 82.36,74.94 61.98,74.94 arc90 58.74,71.71 58.74,60.4 arc90 61.98,57.16 82.36,57.16 arc90
ADCLRCLK  (via drill 0.35)
  Top 0.203: v17.91,6.46 18,6.55 20.35,4.21 21.24,4.21 22.57,2.87 U$12.NA2
  Bottom 0.203: v17.91,6.46 17.69,6.68 U2.7
ADCLRCLK1  (via drill 0.35)
  Top 0.203: v17.91,25.51 18,25.6 20.35,23.26 21.24,23.26 22.57,21.92 U$1.NA2
  Bottom 0.203: v17.91,25.51 17.69,25.73 U1.7
ADCLRCLK2  (via drill 0.35)
  Top 0.203: v17.91,44.56 18,44.66 20.35,42.31 21.24,42.31 22.57,40.97 U$2.NA2
  Bottom 0.203: v17.91,44.56 17.69,44.78 16.24,44.78 U3.7
ADCLRCLK3  (via drill 0.35)
  Top 0.203: v17.91,63.61 18,63.71 20.35,61.36 21.24,61.36 22.57,60.02 U$3.NA2
  Bottom 0.203: v17.91,63.61 17.69,63.83 16.24,63.83 U4.7
ADCLRCLK4  (via drill 0.35)
  Top 0.203: v47.12,6.46 47.21,6.55 49.56,4.21 50.45,4.21 51.78,2.87 U$4.NA2
  Bottom 0.203: v47.12,6.46 46.9,6.68 U5.7
ADCLRCLK5  (via drill 0.35)
  Top 0.203: v47.12,25.51 47.21,25.6 49.56,23.26 50.45,23.26 51.78,21.92 U$5.NA2
  Bottom 0.203: v47.12,25.51 46.9,25.73 U6.7
ADCLRCLK6  (via drill 0.35)
  Top 0.203: v47.12,44.56 47.21,44.66 49.56,42.31 50.45,42.31 51.78,40.97 U$6.NA2
  Bottom 0.203: v47.12,44.56 46.9,44.78 45.45,44.78 U7.7
ADCLRCLK7  (via drill 0.35)
  Top 0.203: v47.12,63.61 47.21,63.71 49.56,61.36 50.45,61.36 51.78,60.02 U$7.NA2
  Bottom 0.203: v47.12,63.61 46.9,63.83 45.45,63.83 U8.7
ADCLRCLK8  (via drill 0.35)
  Top 0.203: v76.33,6.46 76.42,6.55 78.77,4.21 79.66,4.21 80.99,2.87 U$8.NA2
  Bottom 0.203: v76.33,6.46 76.11,6.68 U9.7
ADCLRCLK9  (via drill 0.35)
  Top 0.203: v76.33,25.51 76.42,25.6 78.77,23.26 79.66,23.26 80.99,21.92 U$9.NA2
  Bottom 0.203: v76.33,25.51 76.11,25.73 U10.7
ADCLRCLK10  (via drill 0.35)
  Top 0.203: v76.33,44.56 76.42,44.66 78.77,42.31 79.66,42.31 80.99,40.97 U$10.NA2
  Bottom 0.203: v76.33,44.56 76.11,44.78 74.66,44.78 U11.7
ADCLRCLK11  (via drill 0.35)
  Top 0.203: v76.33,63.61 76.42,63.71 78.77,61.36 79.66,61.36 80.99,60.02 U$11.NA2
  Bottom 0.203: v76.33,63.61 76.11,63.83 74.66,63.83 U12.7
AGND  (via drill 0.35)
  Top 0.406: 12.1,3 v12.07,2.97 | v12.89,2.97 15.04,2.97 C17.- | v21.49,8.49 21.43,8.56 21.43,10.05 | 21.43,10.05 21.43,10.28 | v22.38,8.49 22.38,9.1 21.43,10.05
  Top 0.61: C17.- 15.07,3 12.1,3
  Top 1.27: 21.43,10.28 C14.-
  Bottom 0.406: R4.1 6.75,3.35 7.86,2.23 7.91,2.23 8,2.14 U2.15 12.89,2.14 | 18.29,4.15 18.29,4.61 20.16,6.48 C16.- 21.49,8.45 | C13.2 19.89,2.55 18.29,4.15 | 12.89,2.14 13.4,2.14 14.24,2.98 | 14.24,2.98 15.35,4.09 U2.11 18.22,4.09 18.29,4.15 | v12.07,2.97 12.08,2.98 14.24,2.98 | v12.89,2.97 12.89,2.14 | 21.49,8.45 v21.49,8.49 | v22.38,8.49 22.34,8.45 21.49,8.45
  Bottom 0.61: U$12.ROUT- 2.25,5.14 0.96,6.43 0.96,8.96 2.17,10.17 U$12.LOUT-
  Bottom 0.813: U$12.ROUT- 2.35,5.19 4.4,5.19 C18.2 4.65,5.18 6.49,3.35 R4.1 | R5.1 6.57,10.9 | 6.57,10.9 6.57,12.16 C15.2 6.62,13.43 U$12.AGND | U$12.LOUT- 2.98,10.9 6.57,10.9
AGND1  (via drill 0.35)
  Top 0.406: 12.1,22.05 v12.07,22.02 | v12.89,22.02 15.04,22.02 C5.- | v21.49,27.54 21.43,27.61 21.43,29.1 | 21.43,29.1 21.43,29.33 | v22.38,27.54 22.38,28.15 21.43,29.1
  Top 0.61: C5.- 15.07,22.05 12.1,22.05
  Top 1.27: 21.43,29.33 C2.-
  Bottom 0.406: R1.1 6.75,22.4 7.86,21.28 7.91,21.28 8,21.19 U1.15 12.89,21.19 | 18.29,23.2 18.29,23.66 20.16,25.53 C4.- 21.49,27.5 | C1.2 19.89,21.6 18.29,23.2 | 12.89,21.19 13.4,21.19 14.24,22.03 | 14.24,22.03 15.35,23.14 U1.11 18.22,23.14 18.29,23.2 | v12.07,22.02 12.08,22.03 14.24,22.03 | v12.89,22.02 12.89,21.19 | 21.49,27.5 v21.49,27.54 | v22.38,27.54 22.34,27.5 21.49,27.5
  Bottom 0.61: U$1.ROUT- 2.25,24.19 0.96,25.48 0.96,28.01 2.17,29.22 U$1.LOUT-
  Bottom 0.813: U$1.ROUT- 2.35,24.24 4.4,24.24 C6.2 4.65,24.23 6.49,22.4 R1.1 | R2.1 6.57,29.95 | 6.57,29.95 6.57,31.21 C3.2 6.62,32.48 U$1.AGND | U$1.LOUT- 2.98,29.95 6.57,29.95
AGND2  (via drill 0.35)
  Top 0.406: 12.1,41.1 v12.07,41.07 | v12.89,41.07 15.04,41.07 C29.- | v21.49,46.59 21.43,46.66 21.43,48.15 | 21.43,48.15 21.43,48.38 | v22.38,46.59 22.38,47.2 21.43,48.15
  Top 0.61: C29.- 15.07,41.1 12.1,41.1
  Top 1.27: 21.43,48.38 C26.-
  Bottom 0.406: R7.1 6.75,41.45 7.86,40.33 7.91,40.33 8,40.24 U3.15 12.89,40.24 | 18.29,42.25 18.29,42.71 20.16,44.58 C28.- 21.49,46.55 | C25.2 19.89,40.65 18.29,42.25 | 12.89,40.24 13.4,40.24 14.24,41.08 | 14.24,41.08 15.35,42.19 U3.11 18.22,42.19 18.29,42.25 | v12.07,41.07 12.08,41.08 14.24,41.08 | v12.89,41.07 12.89,40.24 | 21.49,46.55 v21.49,46.59 | v22.38,46.59 22.34,46.55 21.49,46.55
  Bottom 0.61: U$2.ROUT- 2.25,43.24 0.96,44.53 0.96,47.06 2.17,48.27 U$2.LOUT-
  Bottom 0.813: U$2.ROUT- 2.35,43.29 4.4,43.29 C30.2 4.65,43.28 6.49,41.45 R7.1 | R8.1 6.57,49 | 6.57,49 6.57,50.26 C27.2 6.62,51.53 U$2.AGND | U$2.LOUT- 2.98,49 6.57,49
AGND3  (via drill 0.35)
  Top 0.406: 12.1,60.15 v12.07,60.12 | v12.89,60.12 15.04,60.12 C41.- | v21.49,65.64 21.43,65.71 21.43,67.2 | 21.43,67.2 21.43,67.43 | v22.38,65.64 22.38,66.25 21.43,67.2
  Top 0.61: C41.- 15.07,60.15 12.1,60.15
  Top 1.27: 21.43,67.43 C38.-
  Bottom 0.406: R10.1 6.75,60.5 7.86,59.38 7.91,59.38 8,59.29 U4.15 12.89,59.29 | 18.29,61.3 18.29,61.76 20.16,63.63 C40.- 21.49,65.6 | C37.2 19.89,59.7 18.29,61.3 | 12.89,59.29 13.4,59.29 14.24,60.13 | 14.24,60.13 15.35,61.24 U4.11 18.22,61.24 18.29,61.3 | v12.07,60.12 12.08,60.13 14.24,60.13 | v12.89,60.12 12.89,59.29 | 21.49,65.6 v21.49,65.64 | v22.38,65.64 22.34,65.6 21.49,65.6
  Bottom 0.61: U$3.ROUT- 2.25,62.29 0.96,63.58 0.96,66.11 2.17,67.32 U$3.LOUT-
  Bottom 0.813: U$3.ROUT- 2.35,62.34 4.4,62.34 C42.2 4.65,62.33 6.49,60.5 R10.1 | R11.1 6.57,68.05 | 6.57,68.05 6.57,69.31 C39.2 6.62,70.58 U$3.AGND | U$3.LOUT- 2.98,68.05 6.57,68.05
AGND4  (via drill 0.35)
  Top 0.406: 41.31,3 v41.28,2.97 | v42.1,2.97 44.25,2.97 C53.- | v50.7,8.49 50.64,8.56 50.64,10.05 | 50.64,10.05 50.64,10.28 | v51.59,8.49 51.59,9.1 50.64,10.05
  Top 0.61: C53.- 44.28,3 41.31,3
  Top 1.27: 50.64,10.28 C50.-
  Bottom 0.406: R13.1 35.96,3.35 37.07,2.23 37.12,2.23 37.21,2.14 U5.15 42.1,2.14 | 47.5,4.15 47.5,4.61 49.37,6.48 C52.- 50.7,8.45 | C49.2 49.1,2.55 47.5,4.15 | 42.1,2.14 42.61,2.14 43.45,2.98 | 43.45,2.98 44.56,4.09 U5.11 47.43,4.09 47.5,4.15 | v41.28,2.97 41.29,2.98 43.45,2.98 | v42.1,2.97 42.1,2.14 | 50.7,8.45 v50.7,8.49 | v51.59,8.49 51.55,8.45 50.7,8.45
  Bottom 0.61: U$4.ROUT- 31.46,5.14 30.17,6.43 30.17,8.96 31.38,10.17 U$4.LOUT-
  Bottom 0.813: U$4.ROUT- 31.56,5.19 33.61,5.19 C54.2 33.86,5.18 35.7,3.35 R13.1 | R14.1 35.78,10.9 | 35.78,10.9 35.78,12.16 C51.2 35.83,13.43 U$4.AGND | U$4.LOUT- 32.19,10.9 35.78,10.9
AGND5  (via drill 0.35)
  Top 0.406: 41.31,22.05 v41.28,22.02 | v42.1,22.02 44.25,22.02 C65.- | v50.7,27.54 50.64,27.61 50.64,29.1 | 50.64,29.1 50.64,29.33 | v51.59,27.54 51.59,28.15 50.64,29.1
  Top 0.61: C65.- 44.28,22.05 41.31,22.05
  Top 1.27: 50.64,29.33 C62.-
  Bottom 0.406: R16.1 35.96,22.4 37.07,21.28 37.12,21.28 37.21,21.19 U6.15 42.1,21.19 | 47.5,23.2 47.5,23.66 49.37,25.53 C64.- 50.7,27.5 | C61.2 49.1,21.6 47.5,23.2 | 42.1,21.19 42.61,21.19 43.45,22.03 | 43.45,22.03 44.56,23.14 U6.11 47.43,23.14 47.5,23.2 | v41.28,22.02 41.29,22.03 43.45,22.03 | v42.1,22.02 42.1,21.19 | 50.7,27.5 v50.7,27.54 | v51.59,27.54 51.55,27.5 50.7,27.5
  Bottom 0.61: U$5.ROUT- 31.46,24.19 30.17,25.48 30.17,28.01 31.38,29.22 U$5.LOUT-
  Bottom 0.813: U$5.ROUT- 31.56,24.24 33.61,24.24 C66.2 33.86,24.23 35.7,22.4 R16.1 | R17.1 35.78,29.95 | 35.78,29.95 35.78,31.21 C63.2 35.83,32.48 U$5.AGND | U$5.LOUT- 32.19,29.95 35.78,29.95
AGND6  (via drill 0.35)
  Top 0.406: 41.31,41.1 v41.28,41.07 | v42.1,41.07 44.25,41.07 C77.- | v50.7,46.59 50.64,46.66 50.64,48.15 | 50.64,48.15 50.64,48.38 | v51.59,46.59 51.59,47.2 50.64,48.15
  Top 0.61: C77.- 44.28,41.1 41.31,41.1
  Top 1.27: 50.64,48.38 C74.-
  Bottom 0.406: R19.1 35.96,41.45 37.07,40.33 37.12,40.33 37.21,40.24 U7.15 42.1,40.24 | 47.5,42.25 47.5,42.71 49.37,44.58 C76.- 50.7,46.55 | C73.2 49.1,40.65 47.5,42.25 | 42.1,40.24 42.61,40.24 43.45,41.08 | 43.45,41.08 44.56,42.19 U7.11 47.43,42.19 47.5,42.25 | v41.28,41.07 41.29,41.08 43.45,41.08 | v42.1,41.07 42.1,40.24 | 50.7,46.55 v50.7,46.59 | v51.59,46.59 51.55,46.55 50.7,46.55
  Bottom 0.61: U$6.ROUT- 31.46,43.24 30.17,44.53 30.17,47.06 31.38,48.27 U$6.LOUT-
  Bottom 0.813: U$6.ROUT- 31.56,43.29 33.61,43.29 C78.2 33.86,43.28 35.7,41.45 R19.1 | R20.1 35.78,49 | 35.78,49 35.78,50.26 C75.2 35.83,51.53 U$6.AGND | U$6.LOUT- 32.19,49 35.78,49
AGND7  (via drill 0.35)
  Top 0.406: 41.31,60.15 v41.28,60.12 | v42.1,60.12 44.25,60.12 C89.- | v50.7,65.64 50.64,65.71 50.64,67.2 | 50.64,67.2 50.64,67.43 | v51.59,65.64 51.59,66.25 50.64,67.2
  Top 0.61: C89.- 44.28,60.15 41.31,60.15
  Top 1.27: 50.64,67.43 C86.-
  Bottom 0.406: R22.1 35.96,60.5 37.07,59.38 37.12,59.38 37.21,59.29 U8.15 42.1,59.29 | 47.5,61.3 47.5,61.76 49.37,63.63 C88.- 50.7,65.6 | C85.2 49.1,59.7 47.5,61.3 | 42.1,59.29 42.61,59.29 43.45,60.13 | 43.45,60.13 44.56,61.24 U8.11 47.43,61.24 47.5,61.3 | v41.28,60.12 41.29,60.13 43.45,60.13 | v42.1,60.12 42.1,59.29 | 50.7,65.6 v50.7,65.64 | v51.59,65.64 51.55,65.6 50.7,65.6
  Bottom 0.61: U$7.ROUT- 31.46,62.29 30.17,63.58 30.17,66.11 31.38,67.32 U$7.LOUT-
  Bottom 0.813: U$7.ROUT- 31.56,62.34 33.61,62.34 C90.2 33.86,62.33 35.7,60.5 R22.1 | R23.1 35.78,68.05 | 35.78,68.05 35.78,69.31 C87.2 35.83,70.58 U$7.AGND | U$7.LOUT- 32.19,68.05 35.78,68.05
AGND8  (via drill 0.35)
  Top 0.406: 70.52,3 v70.49,2.97 | v71.31,2.97 73.46,2.97 C101.- | v79.92,8.49 79.85,8.56 79.85,10.05 | 79.85,10.05 79.85,10.28 | v80.8,8.49 80.8,9.1 79.85,10.05
  Top 0.61: C101.- 73.49,3 70.52,3
  Top 1.27: 79.85,10.28 C98.-
  Bottom 0.406: R25.1 65.17,3.35 66.28,2.23 66.33,2.23 66.42,2.14 U9.15 71.31,2.14 | 76.71,4.15 76.71,4.61 78.58,6.48 C100.- 79.92,8.45 | C97.2 78.31,2.55 76.71,4.15 | 71.31,2.14 71.82,2.14 72.66,2.98 | 72.66,2.98 73.77,4.09 U9.11 76.64,4.09 76.71,4.15 | v70.49,2.97 70.5,2.98 72.66,2.98 | v71.31,2.97 71.31,2.14 | 79.92,8.45 v79.92,8.49 | v80.8,8.49 80.76,8.45 79.92,8.45
  Bottom 0.61: U$8.ROUT- 60.67,5.14 59.38,6.43 59.38,8.96 60.59,10.17 U$8.LOUT-
  Bottom 0.813: U$8.ROUT- 60.77,5.19 62.82,5.19 C102.2 63.07,5.18 64.91,3.35 R25.1 | R26.1 64.99,10.9 | 64.99,10.9 64.99,12.16 C99.2 65.04,13.43 U$8.AGND | U$8.LOUT- 61.4,10.9 64.99,10.9
AGND9  (via drill 0.35)
  Top 0.406: 70.52,22.05 v70.49,22.02 | v71.31,22.02 73.46,22.02 C113.- | v79.92,27.54 79.85,27.61 79.85,29.1 | 79.85,29.1 79.85,29.33 | v80.8,27.54 80.8,28.15 79.85,29.1
  Top 0.61: C113.- 73.49,22.05 70.52,22.05
  Top 1.27: 79.85,29.33 C110.-
  Bottom 0.406: R28.1 65.17,22.4 66.28,21.28 66.33,21.28 66.42,21.19 U10.15 71.31,21.19 | 76.71,23.2 76.71,23.66 78.58,25.53 C112.- 79.92,27.5 | C109.2 78.31,21.6 76.71,23.2 | 71.31,21.19 71.82,21.19 72.66,22.03 | 72.66,22.03 73.77,23.14 U10.11 76.64,23.14 76.71,23.2 | v70.49,22.02 70.5,22.03 72.66,22.03 | v71.31,22.02 71.31,21.19 | 79.92,27.5 v79.92,27.54 | v80.8,27.54 80.76,27.5 79.92,27.5
  Bottom 0.61: U$9.ROUT- 60.67,24.19 59.38,25.48 59.38,28.01 60.59,29.22 U$9.LOUT-
  Bottom 0.813: U$9.ROUT- 60.77,24.24 62.82,24.24 C114.2 63.07,24.23 64.91,22.4 R28.1 | R29.1 64.99,29.95 | 64.99,29.95 64.99,31.21 C111.2 65.04,32.48 U$9.AGND | U$9.LOUT- 61.4,29.95 64.99,29.95
AGND10  (via drill 0.35)
  Top 0.406: 70.52,41.1 v70.49,41.07 | v71.31,41.07 73.46,41.07 C125.- | v79.92,46.59 79.85,46.66 79.85,48.15 | 79.85,48.15 79.85,48.38 | v80.8,46.59 80.8,47.2 79.85,48.15
  Top 0.61: C125.- 73.49,41.1 70.52,41.1
  Top 1.27: 79.85,48.38 C122.-
  Bottom 0.406: R31.1 65.17,41.45 66.28,40.33 66.33,40.33 66.42,40.24 U11.15 71.31,40.24 | 76.71,42.25 76.71,42.71 78.58,44.58 C124.- 79.92,46.55 | C121.2 78.31,40.65 76.71,42.25 | 71.31,40.24 71.82,40.24 72.66,41.08 | 72.66,41.08 73.77,42.19 U11.11 76.64,42.19 76.71,42.25 | v70.49,41.07 70.5,41.08 72.66,41.08 | v71.31,41.07 71.31,40.24 | 79.92,46.55 v79.92,46.59 | v80.8,46.59 80.76,46.55 79.92,46.55
  Bottom 0.61: U$10.ROUT- 60.67,43.24 59.38,44.53 59.38,47.06 60.59,48.27 U$10.LOUT-
  Bottom 0.813: U$10.ROUT- 60.77,43.29 62.82,43.29 C126.2 63.07,43.28 64.91,41.45 R31.1 | R32.1 64.99,49 | 64.99,49 64.99,50.26 C123.2 65.04,51.53 U$10.AGND | U$10.LOUT- 61.4,49 64.99,49
AGND11  (via drill 0.35)
  Top 0.406: 70.52,60.15 v70.49,60.12 | v71.31,60.12 73.46,60.12 C137.- | v79.92,65.64 79.85,65.71 79.85,67.2 | 79.85,67.2 79.85,67.43 | v80.8,65.64 80.8,66.25 79.85,67.2
  Top 0.61: C137.- 73.49,60.15 70.52,60.15
  Top 1.27: 79.85,67.43 C134.-
  Bottom 0.406: R34.1 65.17,60.5 66.28,59.38 66.33,59.38 66.42,59.29 U12.15 71.31,59.29 | 76.71,61.3 76.71,61.76 78.58,63.63 C136.- 79.92,65.6 | C133.2 78.31,59.7 76.71,61.3 | 71.31,59.29 71.82,59.29 72.66,60.13 | 72.66,60.13 73.77,61.24 U12.11 76.64,61.24 76.71,61.3 | v70.49,60.12 70.5,60.13 72.66,60.13 | v71.31,60.12 71.31,59.29 | 79.92,65.6 v79.92,65.64 | v80.8,65.64 80.76,65.6 79.92,65.6
  Bottom 0.61: U$11.ROUT- 60.67,62.29 59.38,63.58 59.38,66.11 60.59,67.32 U$11.LOUT-
  Bottom 0.813: U$11.ROUT- 60.77,62.34 62.82,62.34 C138.2 63.07,62.33 64.91,60.5 R34.1 | R35.1 64.99,68.05 | 64.99,68.05 64.99,69.31 C135.2 65.04,70.58 U$11.AGND | U$11.LOUT- 61.4,68.05 64.99,68.05
BCLK  (via drill 0.35)
  Top 0.203: U$12.I2S_BCLK 24.91,2.55 23.6,3.87 22.08,3.87 21.38,4.57 20.53,4.57 18.86,6.23 v18.86,6.55
  Bottom 0.203: v18.86,6.55 18.86,8.24 17.81,9.29 U2.3
BCLK1  (via drill 0.35)
  Top 0.203: U$1.I2S_BCLK 24.91,21.6 23.6,22.92 22.08,22.92 21.38,23.62 20.53,23.62 18.86,25.28 v18.86,25.6
  Bottom 0.203: v18.86,25.6 18.86,27.29 17.81,28.34 U1.3
BCLK2  (via drill 0.35)
  Top 0.203: U$2.I2S_BCLK 24.91,40.65 23.6,41.97 22.08,41.97 21.38,42.67 20.53,42.67 18.86,44.33 v18.86,44.65
  Bottom 0.203: v18.86,44.65 18.86,46.34 17.81,47.39 U3.3
BCLK3  (via drill 0.35)
  Top 0.203: U$3.I2S_BCLK 24.91,59.7 23.6,61.02 22.08,61.02 21.38,61.72 20.53,61.72 18.86,63.38 v18.86,63.7
  Bottom 0.203: v18.86,63.7 18.86,65.39 17.81,66.44 U4.3
BCLK4  (via drill 0.35)
  Top 0.203: U$4.I2S_BCLK 54.12,2.55 52.81,3.87 51.29,3.87 50.59,4.57 49.74,4.57 48.07,6.23 v48.07,6.55
  Bottom 0.203: v48.07,6.55 48.07,8.24 47.02,9.29 U5.3
BCLK5  (via drill 0.35)
  Top 0.203: U$5.I2S_BCLK 54.12,21.6 52.81,22.92 51.29,22.92 50.59,23.62 49.74,23.62 48.07,25.28 v48.07,25.6
  Bottom 0.203: v48.07,25.6 48.07,27.29 47.02,28.34 U6.3
BCLK6  (via drill 0.35)
  Top 0.203: U$6.I2S_BCLK 54.12,40.65 52.81,41.97 51.29,41.97 50.59,42.67 49.74,42.67 48.07,44.33 v48.07,44.65
  Bottom 0.203: v48.07,44.65 48.07,46.34 47.02,47.39 U7.3
BCLK7  (via drill 0.35)
  Top 0.203: U$7.I2S_BCLK 54.12,59.7 52.81,61.02 51.29,61.02 50.59,61.72 49.74,61.72 48.07,63.38 v48.07,63.7
  Bottom 0.203: v48.07,63.7 48.07,65.39 47.02,66.44 U8.3
BCLK8  (via drill 0.35)
  Top 0.203: U$8.I2S_BCLK 83.33,2.55 82.02,3.87 80.5,3.87 79.8,4.57 78.95,4.57 77.28,6.23 v77.28,6.55
  Bottom 0.203: v77.28,6.55 77.28,8.24 76.23,9.29 U9.3
BCLK9  (via drill 0.35)
  Top 0.203: U$9.I2S_BCLK 83.33,21.6 82.02,22.92 80.5,22.92 79.8,23.62 78.95,23.62 77.28,25.28 v77.28,25.6
  Bottom 0.203: v77.28,25.6 77.28,27.29 76.23,28.34 U10.3
BCLK10  (via drill 0.35)
  Top 0.203: U$10.I2S_BCLK 83.33,40.65 82.02,41.97 80.5,41.97 79.8,42.67 78.95,42.67 77.28,44.33 v77.28,44.65
  Bottom 0.203: v77.28,44.65 77.28,46.34 76.23,47.39 U11.3
BCLK11  (via drill 0.35)
  Top 0.203: U$11.I2S_BCLK 83.33,59.7 82.02,61.02 80.5,61.02 79.8,61.72 78.95,61.72 77.28,63.38 v77.28,63.7
  Bottom 0.203: v77.28,63.7 77.28,65.39 76.23,66.44 U12.3
DBVDD  (via drill 0.35)
  Top 0.406: v17.75,14.18 19.44,14.18 C22.+ 19.47,14.97 v17.75,14.97
  Bottom 0.406: C23.1 14.97,10.59 U2.1 16.83,10.59 17.72,11.47 17.72,14.14 v17.75,14.18 v17.75,14.97
DBVDD1  (via drill 0.35)
  Top 0.406: v17.75,33.23 19.44,33.23 C10.+ 19.47,34.02 v17.75,34.02
  Bottom 0.406: C11.1 14.97,29.64 U1.1 16.83,29.64 17.72,30.52 17.72,33.19 v17.75,33.23 v17.75,34.02
DBVDD2  (via drill 0.35)
  Top 0.406: v17.75,52.28 19.44,52.28 C34.+ 19.47,53.07 v17.75,53.07
  Bottom 0.406: C35.1 14.97,48.69 U3.1 16.83,48.69 17.72,49.57 17.72,52.24 v17.75,52.28 v17.75,53.07
DBVDD3  (via drill 0.35)
  Top 0.406: v17.75,71.33 19.44,71.33 C46.+ 19.47,72.12 v17.75,72.12
  Bottom 0.406: C47.1 14.97,67.74 U4.1 16.83,67.74 17.72,68.62 17.72,71.29 v17.75,71.33 v17.75,72.12
DBVDD4  (via drill 0.35)
  Top 0.406: v46.96,14.18 48.65,14.18 C58.+ 48.68,14.97 v46.96,14.97
  Bottom 0.406: C59.1 44.18,10.59 U5.1 46.04,10.59 46.93,11.47 46.93,14.14 v46.96,14.18 v46.96,14.97
DBVDD5  (via drill 0.35)
  Top 0.406: v46.96,33.23 48.65,33.23 C70.+ 48.68,34.02 v46.96,34.02
  Bottom 0.406: C71.1 44.18,29.64 U6.1 46.04,29.64 46.93,30.52 46.93,33.19 v46.96,33.23 v46.96,34.02
DBVDD6  (via drill 0.35)
  Top 0.406: v46.96,52.28 48.65,52.28 C82.+ 48.68,53.07 v46.96,53.07
  Bottom 0.406: C83.1 44.18,48.69 U7.1 46.04,48.69 46.93,49.57 46.93,52.24 v46.96,52.28 v46.96,53.07
DBVDD7  (via drill 0.35)
  Top 0.406: v46.96,71.33 48.65,71.33 C94.+ 48.68,72.12 v46.96,72.12
  Bottom 0.406: C95.1 44.18,67.74 U8.1 46.04,67.74 46.93,68.62 46.93,71.29 v46.96,71.33 v46.96,72.12
DBVDD8  (via drill 0.35)
  Top 0.406: v76.17,14.18 77.86,14.18 C106.+ 77.89,14.97 v76.17,14.97
  Bottom 0.406: C107.1 73.39,10.59 U9.1 75.25,10.59 76.14,11.47 76.14,14.14 v76.17,14.18 v76.17,14.97
DBVDD9  (via drill 0.35)
  Top 0.406: v76.17,33.23 77.86,33.23 C118.+ 77.89,34.02 v76.17,34.02
  Bottom 0.406: C119.1 73.39,29.64 U10.1 75.25,29.64 76.14,30.52 76.14,33.19 v76.17,33.23 v76.17,34.02
DBVDD10  (via drill 0.35)
  Top 0.406: v76.17,52.28 77.86,52.28 C130.+ 77.89,53.07 v76.17,53.07
  Bottom 0.406: C131.1 73.39,48.69 U11.1 75.25,48.69 76.14,49.57 76.14,52.24 v76.17,52.28 v76.17,53.07
DBVDD11  (via drill 0.35)
  Top 0.406: v76.17,71.33 77.86,71.33 C142.+ 77.89,72.12 v76.17,72.12
  Bottom 0.406: C143.1 73.39,67.74 U12.1 75.25,67.74 76.14,68.62 76.14,71.29 v76.17,71.33 v76.17,72.12
DGND  (via drill 0.7)
  Top 0.406: C22.- 16.21,14.59 18.36,12.44 18.36,8.9 18.32,8.87 C21.-
  Top 0.813: C22.- 14.72,15.32 v12.03,15.32
  Bottom 0.406: C23.2 10.7,12.86 C24.2 8.64,10.93 U2.28 8.95,10.62 8.02,10.62 7.64,10.24 7.64,8.58 R6.1
  Bottom 0.813: C23.2 10.72,14.25 11.78,15.32 v12.03,15.32 13.34,15.32 v13.37,15.35
DGND1  (via drill 0.7)
  Top 0.406: C10.- 16.21,33.64 18.36,31.49 18.36,27.95 18.32,27.92 C9.-
  Top 0.813: C10.- 14.72,34.37 v12.03,34.37
  Bottom 0.406: C11.2 10.7,31.91 C12.2 8.64,29.98 U1.28 8.95,29.67 8.02,29.67 7.64,29.29 7.64,27.63 R3.1
  Bottom 0.813: C11.2 10.72,33.3 11.78,34.37 v12.03,34.37 13.34,34.37 v13.37,34.4
DGND2  (via drill 0.7)
  Top 0.406: C34.- 16.21,52.69 18.36,50.54 18.36,47 18.32,46.97 C33.-
  Top 0.813: C34.- 14.72,53.42 v12.03,53.42
  Bottom 0.406: C35.2 10.7,50.96 C36.2 8.64,49.03 U3.28 8.95,48.72 8.02,48.72 7.64,48.34 7.64,46.68 R9.1
  Bottom 0.813: C35.2 10.72,52.35 11.78,53.42 v12.03,53.42 13.34,53.42 v13.37,53.45
DGND3  (via drill 0.7)
  Top 0.406: C46.- 16.21,71.74 18.36,69.59 18.36,66.05 18.32,66.02 C45.-
  Top 0.813: C46.- 14.72,72.47 v12.03,72.47
  Bottom 0.406: C47.2 10.7,70.01 C48.2 8.64,68.08 U4.28 8.95,67.77 8.02,67.77 7.64,67.39 7.64,65.73 R12.1
  Bottom 0.813: C47.2 10.72,71.4 11.78,72.47 v12.03,72.47 13.34,72.47 v13.37,72.5
DGND4  (via drill 0.7)
  Top 0.406: C58.- 45.42,14.59 47.57,12.44 47.57,8.9 47.53,8.87 C57.-
  Top 0.813: C58.- 43.93,15.32 v41.24,15.32
  Bottom 0.406: C59.2 39.91,12.86 C60.2 37.85,10.93 U5.28 38.16,10.62 37.23,10.62 36.85,10.24 36.85,8.58 R15.1
  Bottom 0.813: C59.2 39.93,14.25 40.99,15.32 v41.24,15.32 42.55,15.32 v42.58,15.35
DGND5  (via drill 0.7)
  Top 0.406: C70.- 45.42,33.64 47.57,31.49 47.57,27.95 47.53,27.92 C69.-
  Top 0.813: C70.- 43.93,34.37 v41.24,34.37